# EAGLE board PCB-164D316B_brd (EAGLE 9.6.2), part 1 of 2
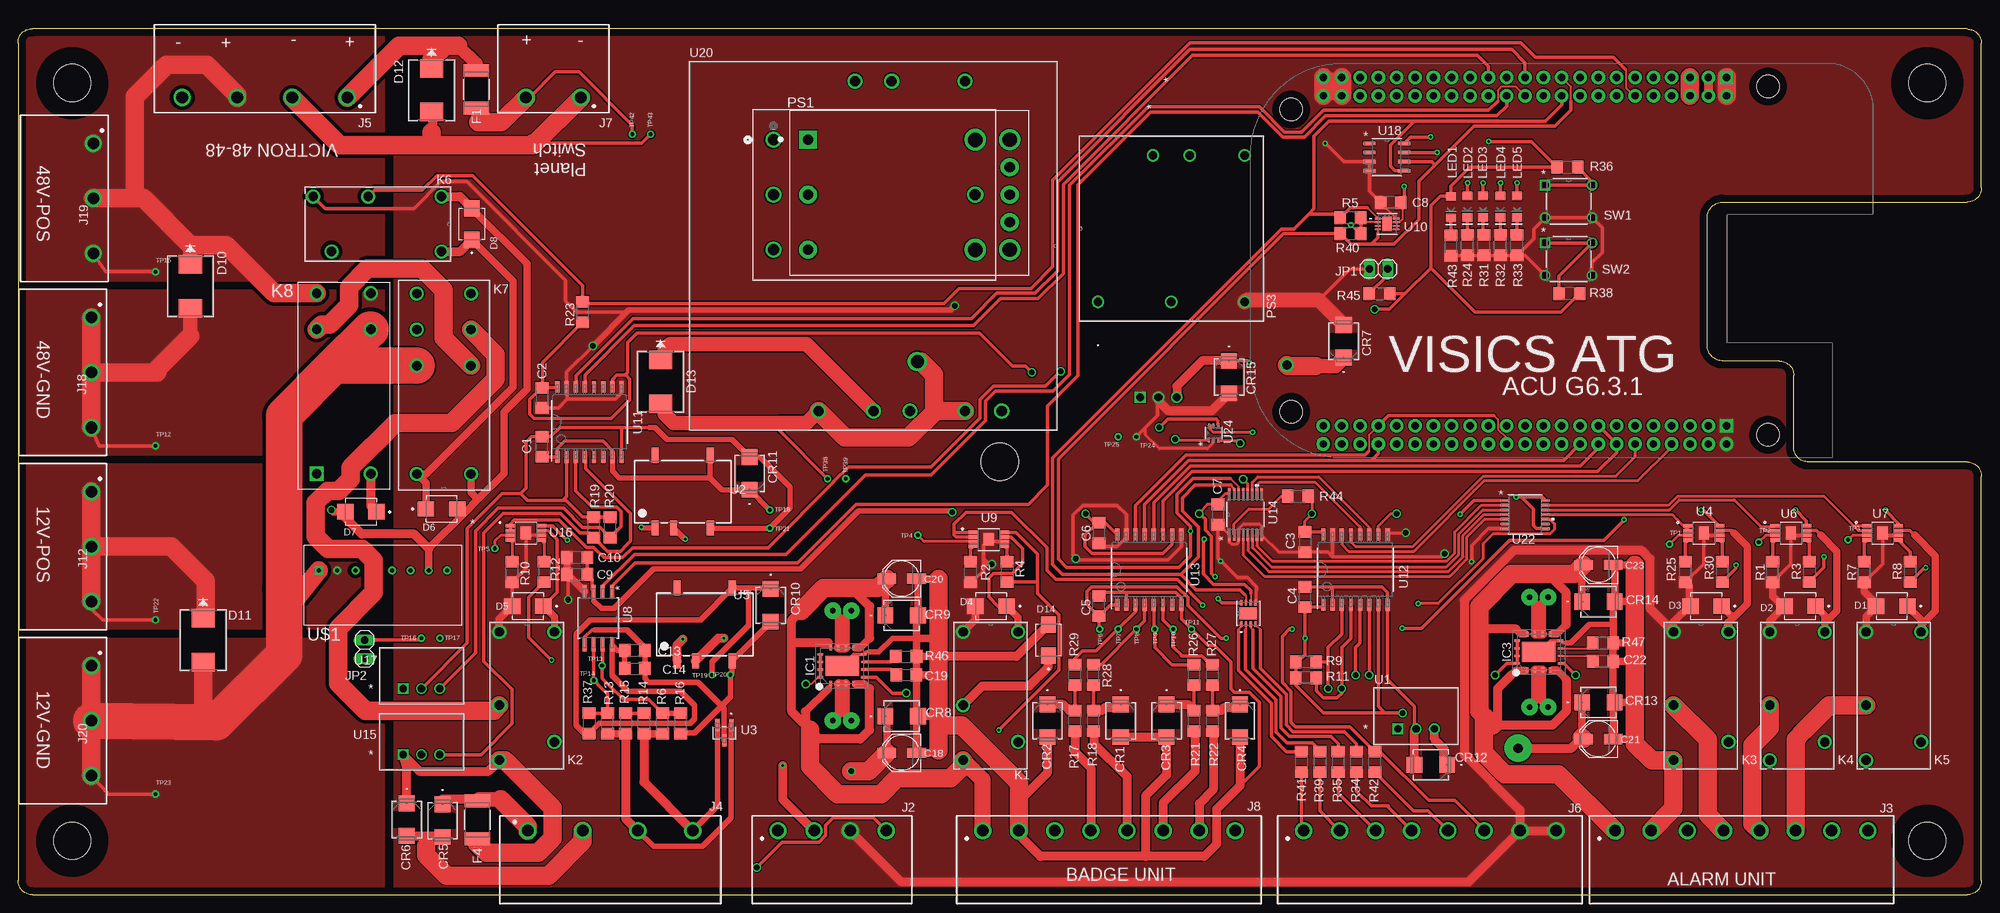
[diagram p0: board, top side]
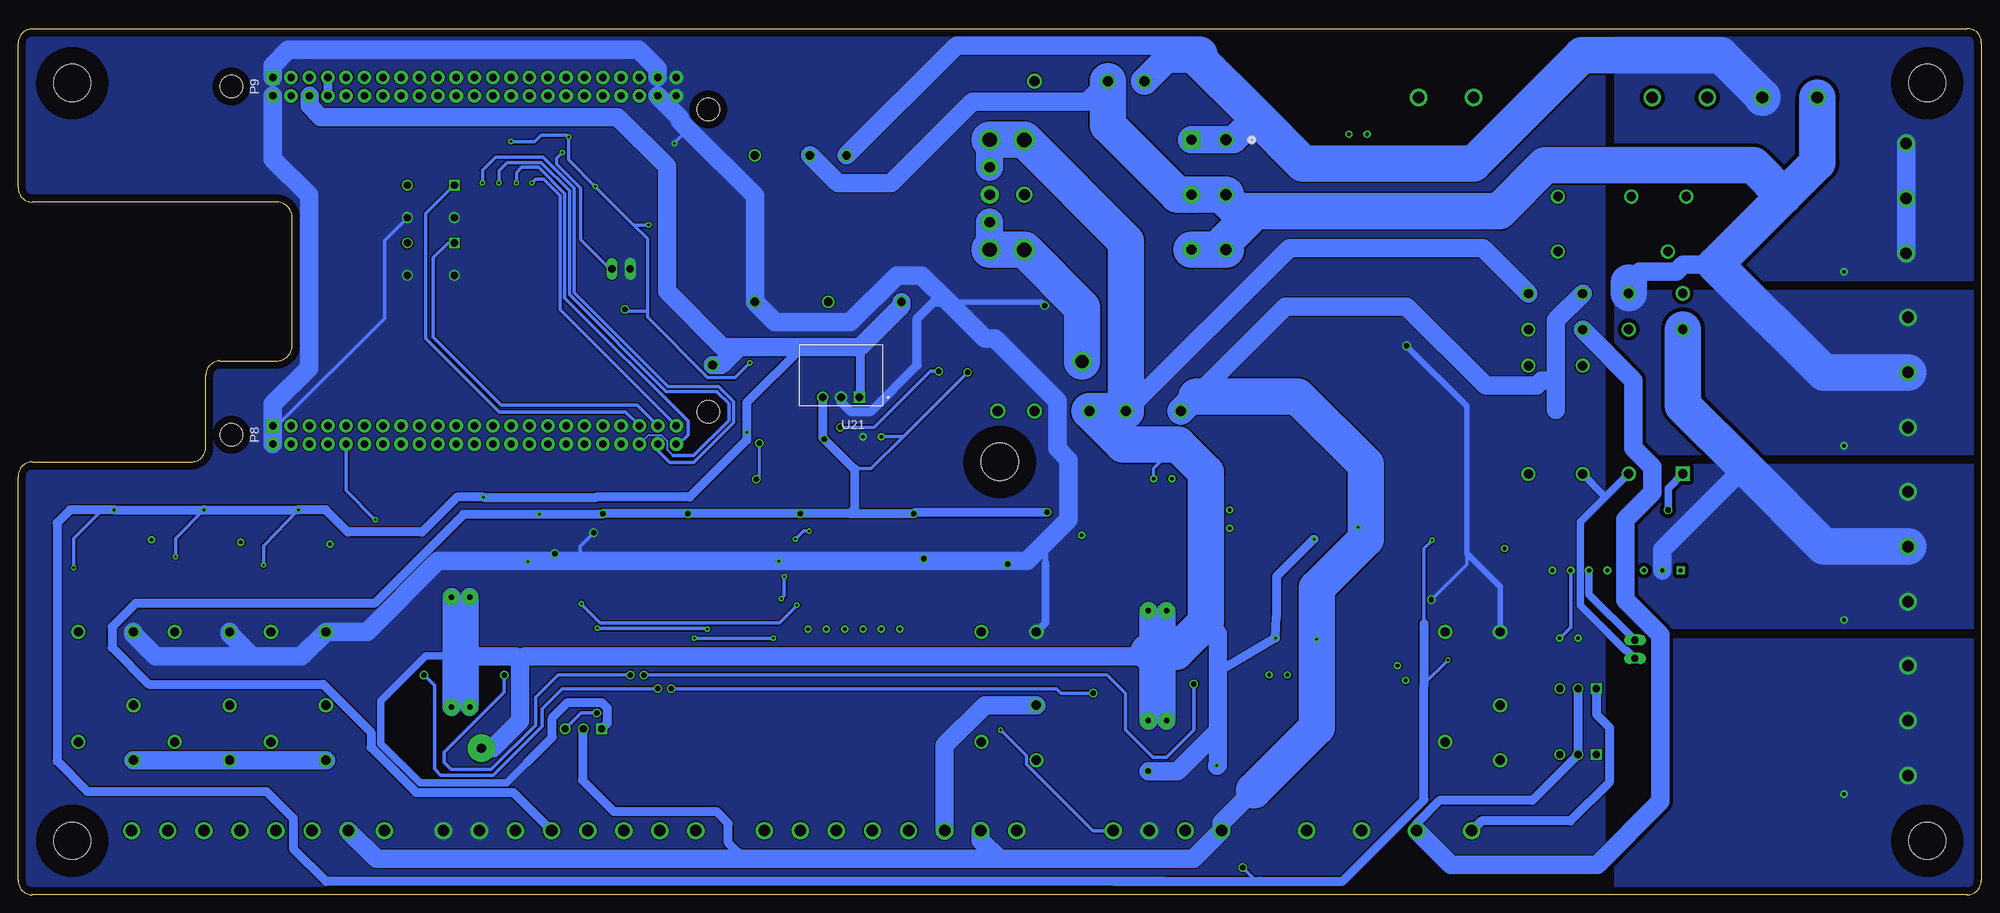
[diagram p1: board, bottom side, seen from below]

Size 272.01 x 120.01 mm. Coordinates in mm from the lower left corner, seen from the top.
Outline: 2.01,0 270.01,0 arc90 272.01,2 272.01,58 arc90 270.01,60 248.01,60 arc-90 246.01,62 246.01,72 arc90 244.01,74 236.01,74 arc-80 234.01,76 234.01,94 arc-80 236.01,96 270.01,96 arc90 272.01,98 272.01,118 arc90 270.01,120 2.01,120 arc100 0.01,118 0.01,2 arc90 2.01,0
Copper layers (1*16): Top 0.035mm / dielectric 1.5mm / Bottom 0.035mm
Design rules "default *": minimum track width 6mil, minimum drill 0.35mm, track to track 6mil, track to pad 6mil, pad to pad 6mil, via to via 6mil, smd to smd 6mil, copper to edge 40mil, drill to drill 6mil, minimum pad ring 10mil, minimum via ring 8mil, stop-mask expansion 4mil, vias tented up to drill 0mil, thermal gap 10mil
Net classes: 1 Power: clearance 0.508 mm to class 0, clearance 0.508 mm
Holes 5.2 mm at 7.51,7.5 7.51,112.5 264.51,112.5 264.51,7.5 136.01,60
tRestrict: area 2.5,2.5 to 12.5,12.5; area 131,55 to 141,65; area 259.5,107.5 to 269.5,117.5; area 259.5,2.5 to 269.5,12.5; area 2.5,107.5 to 12.5,117.5
bRestrict: area 2.5,2.5 to 12.5,12.5; area 2.5,107.5 to 12.5,117.5; area 131,55 to 141,65; area 259.5,107.5 to 269.5,117.5; area 259.5,2.5 to 269.5,12.5

## Footprints (pad centres in the part's own frame; a part is rotated, then mirrored left to right if it is on the bottom)
BEAGLE_BONE_BLACK_CAPE = drill 1.016 pad 1.88 square: P8.1 -24.13,20.955; P9.1 -24.13,-27.305 | drill 1.016 pad 1.88: P8.2 -24.13,23.495; P8.3 -21.59,20.955; P8.4 -21.59,23.495; P8.5 -19.05,20.955; P8.6 -19.05,23.495; P8.7 -16.51,20.955; P8.8 -16.51,23.495; P8.9 -13.97,20.955; P8.10 -13.97,23.495; P8.11 -11.43,20.955; P8.12 -11.43,23.495; P8.13 -8.89,20.955; P8.14 -8.89,23.495; P8.15 -6.35,20.955; P8.16 -6.35,23.495; P8.17 -3.81,20.955; P8.18 -3.81,23.495; P8.19 -1.27,20.955; P8.20 -1.27,23.495; P8.21 1.27,20.955; P8.22 1.27,23.495; P8.23 3.81,20.955; P8.24 3.81,23.495; P8.25 6.35,20.955; P8.26 6.35,23.495; P8.27 8.89,20.955; P8.28 8.89,23.495; P8.29 11.43,20.955; P8.30 11.43,23.495; P8.31 13.97,20.955; P8.32 13.97,23.495; P8.33 16.51,20.955; P8.34 16.51,23.495; P8.35 19.05,20.955; P8.36 19.05,23.495; P8.37 21.59,20.955; P8.38 21.59,23.495; P8.39 24.13,20.955; P8.40 24.13,23.495; P8.41 26.67,20.955; P8.42 26.67,23.495; P8.43 29.21,20.955; P8.44 29.21,23.495; P8.45 31.75,20.955; P8.46 31.75,23.495; P9.2 -24.13,-24.765; P9.3 -21.59,-27.305; P9.4 -21.59,-24.765; P9.5 -19.05,-27.305; P9.6 -19.05,-24.765; P9.7 -16.51,-27.305; P9.8 -16.51,-24.765; P9.9 -13.97,-27.305; P9.10 -13.97,-24.765; P9.11 -11.43,-27.305; P9.12 -11.43,-24.765; P9.13 -8.89,-27.305; P9.14 -8.89,-24.765; P9.15 -6.35,-27.305; P9.16 -6.35,-24.765; P9.17 -3.81,-27.305; P9.18 -3.81,-24.765; P9.19 -1.27,-27.305; P9.20 -1.27,-24.765; P9.21 1.27,-27.305; P9.22 1.27,-24.765; P9.23 3.81,-27.305; P9.24 3.81,-24.765; P9.25 6.35,-27.305; P9.26 6.35,-24.765; P9.27 8.89,-27.305; P9.28 8.89,-24.765; P9.29 11.43,-27.305; P9.30 11.43,-24.765; P9.31 13.97,-27.305; P9.32 13.97,-24.765; P9.33 16.51,-27.305; P9.34 16.51,-24.765; P9.35 19.05,-27.305; P9.36 19.05,-24.765; P9.37 21.59,-27.305; P9.38 21.59,-24.765; P9.39 24.13,-27.305; P9.40 24.13,-24.765; P9.41 26.67,-27.305; P9.42 26.67,-24.765; P9.43 29.21,-27.305; P9.44 29.21,-24.765; P9.45 31.75,-27.305; P9.46 31.75,-24.765 | hole 3.175: -29.845,-26.035; 36.195,-22.86; 36.195,19.05; -29.845,22.225
C1206 = smd 1.6 x 1.8: 1 -1.4,0; 2 1.4,0
PANASONIC_C = smd 2.6 x 1.4: + 2.05,0; - -2.05,0
DO-214AA(SMB_J-BEND)_LTF-M = smd 2.184 x 2.235: 1 -2.261,0; 2 2.261,0
DIOM4336X265N = smd 2.28 x 2.12: A 2.165,0; C -2.165,0
SMDJSERIES_LTF-M = smd 2.565 x 3.2: 1 -3.035,0; 2 3.035,0
0ZCG_BEL = smd 1.778 x 3.505: 1 -2.616,0; 2 2.616,0
QFN105P500X600X80-17N = smd 0.75 x 0.3: 1 -2.5,1.575; 2 -2.5,0.525; 3 -2.5,-0.525; 4 -2.5,-1.575; 9 2.5,-1.575; 10 2.5,-0.525; 11 2.5,0.525; 12 2.5,1.575 | smd 0.3 x 0.75: 5 -1.575,-3; 6 -0.525,-3; 7 0.525,-3; 8 1.575,-3; 13 1.575,3; 14 0.525,3; 15 -0.525,3; 16 -1.575,3 | smd 2.75 x 4.65: 17 0,0
691313710004 = drill 1.6: 1 -7.5,0; 2 -2.5,0; 3 2.5,0; 4 7.5,0
691313710008 = drill 1.6: 1 -17.5,0; 2 -12.5,0; 3 -7.5,0; 4 -2.5,0; 5 2.5,0; 6 7.5,0; 7 12.5,0; 8 17.5,0
691313410004 = drill 1.6: 1 -11.43,0; 2 -3.81,0; 3 3.81,0; 4 11.43,0
691313410002 = drill 1.6: 1 -3.81,0; 2 3.81,0
691313410003 = drill 1.6: 1 -7.62,0; 2 0,0; 3 7.62,0
1X02 = drill 1.016 long: 1 -1.27,0; 2 1.27,0
RELAY_G5Q-1_DC5_OMR = drill 1.3 pad 1.808: 1 -7.62,17.64; 2 -7.62,7.48; 3 -7.62,-0.14; 4 0,2.4; 5 0,17.64
RELAY_G2RL-2_OMR = drill 1.295 pad 1.803: 1 -7.5,24.6; 2 -7.5,9.6; 3 -7.5,4.6; 4 -7.5,-0.4; 5 0,-0.4; 6 0,4.6; 7 0,9.6; 8 0,24.6
G2RG-2A4 = drill 1.3 square: COIL1 2.1,10.2 | drill 1.3: COIL2 2.1,2.7; COM1 22.1,10.2; COM2 22.1,2.7; NO1 27.1,10.2; NO2 27.1,2.7
LED-1206 = smd 1.2 x 1.4: A -1.5,0; C 1.5,0
CONV_ULS-12/5-D48N-C = drill 1.4 pad 2.54 square: 1 -14,7.37 | drill 1.4 pad 2.54: 2 -14,-0.25; 3 -14,-7.87; 5 13.94,-4.06; 6 13.94,-0.25; 7 13.94,3.56 | drill 1.956 pad 2.54: 4 13.94,-7.87; 8 13.94,7.37
REC20K_RCP = drill 1.143 pad 1.651: 1 0,0; 2 0,-5.08; 3 0,-12.7; 4 -20.32,-12.7; 5 -20.32,-2.54; 6 -20.32,7.62
R1206 = smd 1.6 x 1.803: 1 -1.422,0; 2 1.422,0
SW4_1825910-B_TEC = drill 0.991 pad 1.499 square: 1 -6.5,4.5 | drill 0.991 pad 1.499: 2 0,4.5; 3 -6.5,0; 4 0,0
SMALL-TH = drill 0.508 pad 1.016: P$1 0,0
SIP3_R-78K-0.5_RCP = drill 0.991 pad 1.499 square: 1 0,0 | drill 0.991 pad 1.499: 2 2.54,0; 3 5.08,0
WPME-FISM_SMT-8_L13.2W11.4H7.25 = smd 1 x 2.1: 1 -3.81,-5.05; 2 -1.27,-5.05; 4 3.81,-5.05; 5 3.81,5.05; 8 -3.81,5.05
SOT23_SEM-M = smd 0.61 x 1.626: 1 -0.95,-1.067; 2 0.95,-1.067; 3 0,1.067
SOP65P490X110-9N = smd 1.47 x 0.48: 1 -2.15,0.975; 2 -2.15,0.325; 3 -2.15,-0.325; 4 -2.15,-0.975; 5 2.15,-0.975; 6 2.15,-0.325; 7 2.15,0.325; 8 2.15,0.975 | smd 1.425 x 1.76: 9 0,0
21-0262_W8MS+1_ADI-M = smd 1.778 x 0.559: 1 -3.708,1.905; 2 -3.708,0.635; 3 -3.708,-0.635; 4 -3.708,-1.905; 5 3.708,-1.905; 6 3.708,-0.635; 7 3.708,0.635; 8 3.708,1.905
WSON8_DEJ_TEX-M = smd 0.864 x 0.254: 1 -1.27,0.75; 2 -1.27,0.25; 3 -1.27,-0.25; 4 -1.27,-0.75; 5 1.27,-0.75; 6 1.27,-0.25; 7 1.27,0.25; 8 1.27,0.75 | smd 1.295 x 2.007: 9 0,0
DW0016B_HV = smd 1.65 x 0.6: 1 -4.875,4.445; 2 -4.875,3.175; 3 -4.875,1.905; 4 -4.875,0.635; 5 -4.875,-0.635; 6 -4.875,-1.905; 7 -4.875,-3.175; 8 -4.875,-4.445; 9 4.875,-4.445; 10 4.875,-3.175; 11 4.875,-1.905; 12 4.875,-0.635; 13 4.875,0.635; 14 4.875,1.905; 15 4.875,3.175; 16 4.875,4.445
21-0055H_16_MXM-M = smd 1.664 x 0.356: 1 -2.826,2.223; 2 -2.826,1.587; 3 -2.826,0.953; 4 -2.826,0.318; 5 -2.826,-0.318; 6 -2.826,-0.953; 7 -2.826,-1.587; 8 -2.826,-2.223; 9 2.826,-2.223; 10 2.826,-1.587; 11 2.826,-0.953; 12 2.826,-0.318; 13 2.826,0.318; 14 2.826,0.953; 15 2.826,1.587; 16 2.826,2.223
SOIC8_4P9X3P9MC_MCH-L = smd 1.676 x 0.508: 1 -2.413,1.905; 2 -2.413,0.635; 3 -2.413,-0.635; 4 -2.413,-1.905; 5 2.413,-1.905; 6 2.413,-0.635; 7 2.413,0.635; 8 2.413,1.905
PKU4913DPIHS_FPM = drill 1.499 pad 2.007: 1 0,0; 2 0,-7.62; 3 0,-15.24; 6 27.94,-7.62 | drill 2.007 pad 2.515: 4 27.94,-15.24; 8 27.94,0
SKA60_MWU = drill 1.397 pad 1.905: 1 0,0; 2 0,-10.16; 3 0,-15.24; 4 45.72,-20.32; 5 45.72,-12.7; 6 45.72,-7.62; 7 45.72,0; 8 45.72,5.08
CONV_R-78K3.3-2.0 = drill 1.07 square: 1 -2.54,3.05 | drill 1.07: 2 0,3.05; 3 2.54,3.05
TSSOP_0104PWR_TEX-L = smd 1.168 x 0.305: 1 -2.87,1.95; 2 -2.87,1.3; 3 -2.87,0.65; 4 -2.87,0; 5 -2.87,-0.65; 6 -2.87,-1.3; 7 -2.87,-1.95; 8 2.87,-1.95; 9 2.87,-1.3; 10 2.87,-0.65; 11 2.87,0; 12 2.87,0.65; 13 2.87,1.3; 14 2.87,1.95
HVSON8_3X3_NXP = smd 0.762 x 0.305: 1 -1.473,0.991; 2 -1.473,0.33; 3 -1.473,-0.33; 4 -1.473,-0.991; 5 1.473,-0.991; 6 1.473,-0.33; 7 1.473,0.33; 8 1.473,0.991 | smd 1.651 x 2.438: 9 0,0
SC70-6_DCK_TEX-L = smd 0.648 x 0.305: 1 -1.022,0.65; 2 -1.022,0; 3 -1.022,-0.65; 4 1.022,-0.65; 5 1.022,0; 6 1.022,0.65
SPBW03G-12 = drill 0.6: +VIN 4.572,7.62; +VOUT 14.732,7.62; -VOUT 17.272,7.62; NC1 12.192,7.62; NC2 19.812,7.62; RC 7.112,7.62 | drill 0.6 square: -VIN 2.032,7.62

## Placement (x,y rotation side)
B1  SPARKFUN_BEAGLE_BONE_BLACK_CAPE  [BEAGLE_BONE_BLACK_CAPE]  212.59,85.98 180 top
C1  0.1uF  [C1206]  72.57,62.1 90 top
C2  0.1uF  [C1206]  72.57,68.9 270 top
C3  0.1uF  [C1206]  178.3,48.9 270 top
C4  0.1uF  [C1206]  178.3,41.27 90 top
C5  0.1uF  [C1206]  149.72,40.01 90 top
C6  0.1uF  [C1206]  149.72,50.16 270 top
C7  47nF  [C1206]  166.23,52.7 270 top
C8  0.1uF  [C1206]  190.17,95.95 180 top
C9  1uF  [C1206]  77.46,44.39 180 top
C10  0.1uF  [C1206]  77.46,46.74 180 top
C13  1uF  [C1206]  85.46,33.91 0 top
C14  0.1uF  [C1206]  85.46,31.37 0 top
C18  56uF  [PANASONIC_C]  122.42,19.68 180 top
C19  180pF  [C1206]  123.05,30.48 0 top
C20  56uF  [PANASONIC_C]  122.42,43.81 180 top
C21  56uF  [PANASONIC_C]  218.94,21.59 180 top
C22  180pF  [C1206]  219.57,32.38 0 top
C23  56uF  [PANASONIC_C]  218.94,45.72 180 top
CR1  SMBJ6.0A  [DO-214AA(SMB_J-BEND)_LTF-M]  152.77,24.13 270 top
CR2  SMBJ6.0A  [DO-214AA(SMB_J-BEND)_LTF-M]  142.61,24.13 270 top
CR3  SMBJ6.0A  [DO-214AA(SMB_J-BEND)_LTF-M]  159.12,24.13 270 top
CR4  SMBJ6.0A  [DO-214AA(SMB_J-BEND)_LTF-M]  169.28,24.13 270 top
CR5  SMBJ18A  [DO-214AA(SMB_J-BEND)_LTF-M]  58.81,10.29 270 top
CR6  SMBJ18A  [DO-214AA(SMB_J-BEND)_LTF-M]  53.85,10.43 270 top
CR7  SMBJ6.0A  [DO-214AA(SMB_J-BEND)_LTF-M]  183.65,76.71 90 top
CR8  SMBJ15A  [DO-214AA(SMB_J-BEND)_LTF-M]  122.42,24.77 0 top
CR9  SMBJ15A  [DO-214AA(SMB_J-BEND)_LTF-M]  122.42,38.73 0 top
CR10  SMBJ6.0A  [DO-214AA(SMB_J-BEND)_LTF-M]  104.27,40.13 270 top
CR11  SMBJ6.0A  [DO-214AA(SMB_J-BEND)_LTF-M]  101.35,58.42 90 top
CR12  SMBJ6.0A  [DO-214AA(SMB_J-BEND)_LTF-M]  195.71,18.03 180 top
CR13  SMBJ15A  [DO-214AA(SMB_J-BEND)_LTF-M]  218.94,26.67 0 top
CR14  SMBJ15A  [DO-214AA(SMB_J-BEND)_LTF-M]  218.94,40.64 0 top
CR15  SMBJ6.0A  [DO-214AA(SMB_J-BEND)_LTF-M]  167.77,71.75 270 top
D1  ES2D  [DIOM4336X265N]  259.58,40.01 180 top
D2  ES2D  [DIOM4336X265N]  246.88,40.01 180 top
D3  ES2D  [DIOM4336X265N]  233.86,40.01 180 top
D4  ES2D  [DIOM4336X265N]  134.8,40.01 180 top
D5  ES2D  [DIOM4336X265N]  70.62,40.01 180 top
D6  ES2D  [DIOM4336X265N]  58.68,53.47 0 top
D7  ES2D  [DIOM4336X265N]  47.5,53.09 180 top
D8  ES2D  [DIOM4336X265N]  62.87,92.96 90 top
D10  SMDJ64A  [SMDJSERIES_LTF-M]  23.88,84.33 270 top
D11  SMDJ64A  [SMDJSERIES_LTF-M]  25.66,35.31 270 top
D12  SMDJ64A  [SMDJSERIES_LTF-M]  57.28,111.51 270 top
D13  SMDJ15A  [SMDJSERIES_LTF-M]  89.03,71.12 270 top
D14  ES2D  [DIOM4336X265N]  142.75,35.31 90 top
F1  0ZCG0160BF2C  [0ZCG_BEL]  63.51,111.63 90 top
F4  0ZCG0160BF2C  [0ZCG_BEL]  63.63,10.4 270 top
IC1  NIV3071MTW3TWG  [QFN105P500X600X80-17N]  114.16,31.75 90 top
IC3  NIV3071MTW3TWG  [QFN105P500X600X80-17N]  210.68,33.66 90 top
J2  691313710004  [691313710004]  112.78,8.89 0 top
J3  691313710008  [691313710008]  238.77,8.89 0 top
J4  691313410004  [691313410004]  82.05,8.89 0 top
J5  691313410004  [691313410004]  34.17,110.49 180 top
J6  691313710008  [691313710008]  195.59,8.89 0 top
J7  691313410002  [691313410002]  74.17,110.49 180 top
J8  691313710008  [691313710008]  151.14,8.89 0 top
J12  691313410003  [691313410003]  10.17,48.26 270 top
J18  691313410003  [691313410003]  10.17,72.39 270 top
J19  691313410003  [691313410003]  10.42,96.52 270 top
J20  691313410003  [691313410003]  10.17,24.13 270 top
JP1  PINHD1X2  [1X02]  188.47,86.74 180 top
JP2  PINHD1X2  [1X02]  48.01,34.04 270 top
K1  G5Q-14_DC5  [RELAY_G5Q-1_DC5_OMR]  138.55,18.8 0 top
K2  G5Q-14_DC5  [RELAY_G5Q-1_DC5_OMR]  74.3,18.8 0 top
K3  G5Q-14_DC5  [RELAY_G5Q-1_DC5_OMR]  236.97,18.8 0 top
K4  G5Q-14_DC5  [RELAY_G5Q-1_DC5_OMR]  250.31,18.8 0 top
K5  G5Q-14_DC5  [RELAY_G5Q-1_DC5_OMR]  263.64,18.8 0 top
K6  G5Q-14_DC5  [RELAY_G5Q-1_DC5_OMR]  41.03,89.15 270 top
K7  G2RL-2_DC5  [RELAY_G2RL-2_OMR]  55.25,82.93 180 top
K8  G2RG-2A4 DC5  [G2RG-2A4]  51.57,56.26 90 top
LED1  150120GS75000  [LED-1206]  198.49,95.31 270 top
LED2  150120AS75000  [LED-1206]  200.79,95.38 270 top
LED3  150120RS75000  [LED-1206]  202.95,95.38 270 top
LED4  150120YS75000  [LED-1206]  205.37,95.38 270 top
LED5  150120BS75000  [LED-1206]  207.65,95.38 270 top
PS1  ULS-12/5-D48N-C  [CONV_ULS-12/5-D48N-C]  123.45,97.28 0 top
PS3  REC30K-4805SZ  [REC20K_RCP]  157.23,102.49 90 top
R1  1K  [R1206]  243.07,44.77 270 top
R2  1K  [R1206]  131.94,44.77 270 top
R3  100K  [R1206]  248.15,44.77 90 top
R4  100K  [R1206]  137.02,44.77 90 top
R5  4.7K  [R1206]  184.58,93.85 180 top
R6  10R  [R1206]  89.27,23.75 270 top
R7  1K  [R1206]  255.77,44.77 270 top
R8  100K  [R1206]  262.12,44.77 90 top
R9  15K  [R1206]  178.44,32.26 0 top
R10  1K  [R1206]  68.46,44.77 270 top
R11  15K  [R1206]  178.44,30.1 0 top
R12  100K  [R1206]  72.9,44.77 90 top
R13  10R  [R1206]  81.65,23.75 270 top
R14  330R  [R1206]  86.73,23.75 270 top
R15  120R  [R1206]  84.19,23.75 90 top
R16  5.1K  [R1206]  91.81,23.75 270 top
R17  100R  [R1206]  146.42,24.13 270 top
R18  100R  [R1206]  148.96,24.13 270 top
R19  20K  [R1206]  79.76,50.93 270 top
R20  20K  [R1206]  82.05,50.93 270 top
R21  100R  [R1206]  162.93,24.13 270 top
R22  100R  [R1206]  165.47,24.13 270 top
R23  20K  [R1206]  78.24,80.77 270 top
R24  510R  [R1206]  200.79,90.04 270 top
R25  1K  [R1206]  231,44.77 270 top
R26  100R  [R1206]  162.93,30.48 270 top
R27  100R  [R1206]  165.47,30.48 270 top
R28  100R  [R1206]  148.96,30.48 270 top
R29  100R  [R1206]  146.42,30.48 270 top
R30  100K  [R1206]  236.08,44.77 90 top
R31  510R  [R1206]  203.08,90.04 270 top
R32  510R  [R1206]  205.37,90.04 270 top
R33  510R  [R1206]  207.65,90.04 270 top
R34  25R  [R1206]  185.43,18.41 90 top
R35  25R  [R1206]  182.89,18.41 90 top
R36  10K  [R1206]  214.64,100.84 180 top
R37  5.1K  [R1206]  79.11,23.75 90 top
R38  10K  [R1206]  214.89,83.31 0 top
R39  75R  [R1206]  180.35,18.41 90 top
R40  4.7K  [R1206]  184.58,91.63 180 top
R41  DNP  [R1206]  177.81,18.41 90 top
R42  10K  [R1206]  187.97,18.41 270 top
R43  510R  [R1206]  198.53,89.98 270 top
R44  10K  [R1206]  177.3,55.24 180 top
R45  10K  [R1206]  188.6,83.31 180 top
R46  62K  [R1206]  123.05,33.02 180 top
R47  62K  [R1206]  219.57,34.92 180 top
SW1  1825910-6  [SW4_1825910-B_TEC]  218.07,93.85 0 top
SW2  1825910-6  [SW4_1825910-B_TEC]  218.07,85.85 0 top
TP1  TH  [SMALL-TH]  228.78,48.58 0 top
TP2  TH  [SMALL-TH]  241.16,48.9 0 top
TP3  TH  [SMALL-TH]  253.54,49.21 0 top
TP4  TH  [SMALL-TH]  124.64,49.85 0 top
TP5  TH  [SMALL-TH]  66.05,48.01 0 top
TP6  TH  [SMALL-TH]  149.87,36.83 90 top
TP7  TH  [SMALL-TH]  152.41,36.83 90 top
TP8  TH  [SMALL-TH]  154.95,36.83 90 top
TP9  TH  [SMALL-TH]  157.49,36.83 90 top
TP10  TH  [SMALL-TH]  160.03,36.83 90 top
TP11  TH  [SMALL-TH]  162.57,36.83 0 top
TP12  TH  [SMALL-TH]  19.06,62.23 0 top
TP13  TH  [SMALL-TH]  80.91,31.75 0 top
TP14  TH  [SMALL-TH]  79.76,29.72 0 top
TP15  TH  [SMALL-TH]  19.06,86.36 0 top
TP16  TH  [SMALL-TH]  55.89,35.56 90 top
TP17  TH  [SMALL-TH]  58.43,35.56 90 top
TP18  TH  [SMALL-TH]  104.15,53.34 90 top
TP19  TH  [SMALL-TH]  96.15,30.48 0 top
TP20  TH  [SMALL-TH]  98.69,30.48 0 top
TP21  TH  [SMALL-TH]  104.15,50.8 90 top
TP22  TH  [SMALL-TH]  19.06,38.1 0 top
TP23  TH  [SMALL-TH]  19.06,13.97 0 top
TP24  TH  [SMALL-TH]  154.95,63.5 270 top
TP25  TH  [SMALL-TH]  152.41,63.5 270 top
TP38  TH  [SMALL-TH]  112.15,57.66 0 top
TP39  TH  [SMALL-TH]  114.69,57.66 0 top
TP42  TH  [SMALL-TH]  85.1,105.41 90 top
TP43  TH  [SMALL-TH]  87.64,105.41 90 top
U1  R-78K5.0-0.5  [SIP3_R-78K-0.5_RCP]  191.14,22.99 0 top
U2  1769205241  [WPME-FISM_SMT-8_L13.2W11.4H7.25]  92.08,55.88 0 top
U3  SM712.TCT  [SOT23_SEM-M]  97.84,22.48 180 top
U4  TPS1H200AQDGNRQ1  [SOP65P490X110-9N]  233.54,50.16 0 top
U5  1769205241  [WPME-FISM_SMT-8_L13.2W11.4H7.25]  95.13,37.47 0 top
U6  TPS1H200AQDGNRQ1  [SOP65P490X110-9N]  245.61,50.16 0 top
U7  TPS1H200AQDGNRQ1  [SOP65P490X110-9N]  258.31,50.16 0 top
U8  MAX22026FAWA+  [21-0262_W8MS+1_ADI-M]  80.38,38.35 270 top
U9  TPS1H200AQDGNRQ1  [SOP65P490X110-9N]  134.48,49.28 0 top
U10  HDC3022QDEJRQ1  [WSON8_DEJ_TEX-M]  189.66,92.96 0 top
U11  ISO7742DWR  [DW0016B_HV]  79.17,65.53 90 top
U12  ISO7742DWR  [DW0016B_HV]  185.28,45.09 90 top
U13  ISO7740DWR  [DW0016B_HV]  156.71,45.09 90 top
U14  MAX7320AEE+  [21-0055H_16_MXM-M]  170.04,52.7 90 top
U15  R-78K5.0-0.5  [SIP3_R-78K-0.5_RCP]  53.35,19.43 0 top
U16  TPS1H200AQDGNRQ1  [SOP65P490X110-9N]  70.36,50.16 0 top
U17  R-78K5.0-0.5  [SIP3_R-78K-0.5_RCP]  53.35,28.57 0 top
U18  AT24CM02-SSHD-B  [SOIC8_4P9X3P9MC_MCH-L]  189.62,102.23 0 top
U19  PKU4913DPIHS  [PKU4913DPIHS_FPM]  104.65,104.65 0 top
U20  SKA60C-12  [SKA60_MWU]  131.2,112.78 270 top
U21  R-78K3.3-2.0  [CONV_R-78K3.3-2.0]  157.99,72.01 180 bottom
U22  TXU0104PWR  [TSSOP_0104PWR_TEX-L]  208.79,52.7 0 top
U23  PCA9632TK,118  [HVSON8_3X3_NXP]  170.44,38.99 90 top
U24  TXU0101DCKRSC70-6_DCK_TEX-L  [SC70-6_DCK_TEX-L]  165.61,64.01 90 top
U$1  SPAN02C-05  [SPBW03G-12]  39.63,37.34 0 top

## Library data of the parts
B1 = SparkFun-Boards
C1-C10 C13 C14 C18-C23 R1-R47 = adafruit
CR1-CR15 = SMBJ5_0A; COPYRIGHT: Copyright (C) 2024 Ultra Librarian. All rights reserved.; MANUFACTURER_PART_NUMBER: SMBJ5.0A; MFR_NAME: Littelfuse Inc
D1-D8 D14 = ES2D; CHECK_PRICES: https://www.snapeda.com/parts/ES2D/taiwan/view-part/?ref=eda; DESCRIPTION: 35ns, 2A, 200V, Super Fast Recovery Rectifier; DIGIKEY_PART_NUMBER: 1801-ES2DTR-ND; MF: Taiwan Semiconductor; MP: ES2D; PACKAGE: SMD-2 Taiwan Semiconductor; SNAPEDA_LINK: https://www.snapeda.com/parts/ES2D/taiwan/view-part/?ref=snap
D10-D13 = SMDJ64A; COPYRIGHT: Copyright (C) 2025 Ultra Librarian. All rights reserved.; MANUFACTURER_PART_NUMBER: SMDJ64A; MFR_NAME: Littelfuse Inc
F1 F4 = resettable fuse 3.2A; COPYRIGHT: Copyright (C) 2024 Ultra Librarian. All rights reserved.; MANUFACTURER_PART_NUMBER: 0ZCG0160BF2C; MFR_NAME: Belfuse
IC1 IC3 = NIV3071MTW3TWG; DESCRIPTION: Electronic fuse (eFuse) 4-channel, 8V to 60V, 10A in 5x6mm package; HEIGHT: 0.8mm; MANUFACTURER_NAME: onsemi; MANUFACTURER_PART_NUMBER: NIV3071MTW3TWG; MOUSER_PART_NUMBER: 863-NIV3071MTW3TWG; MOUSER_PRICE-STOCK: https://www.mouser.co.uk/ProductDetail/onsemi/NIV3071MTW3TWG?qs=Z%252BL2brAPG1LjnaaESAxKkw%3D%3D
J2 = Wago_connectors; DATASHEET-URL: https://www.we-online.com/redexpert/spec/691313710004?ae; IR-UL: 20A; IR-VDE: 20A; MOUNT: THT; PART-NUMBER: 691313710004; PINS: 4; PITCH: 5mm; TYPE: Horizontal; WORKING-VOLTAGE-UL: 300V (AC); WORKING-VOLTAGE-VDE: 300V (AC)
J3 J6 J8 = Wago_connectors; DATASHEET-URL: https://www.we-online.com/redexpert/spec/691313710008?ae; IR-UL: 20A; IR-VDE: 20A; MOUNT: THT; PART-NUMBER: 691313710008; PINS: 8; PITCH: 5mm; TYPE: Horizontal; WORKING-VOLTAGE-UL: 300V (AC); WORKING-VOLTAGE-VDE: 300V (AC)
J4 J5 = Wago_connectors; DATASHEET-URL: https://www.we-online.com/redexpert/spec/691313410004?ae; IR-UL: 20A; MOUNT: THT; PART-NUMBER: 691313410004; PINS: 4; PITCH: 7.62mm; TYPE: Horizontal; WORKING-VOLTAGE-UL: 300V (AC)
J7 = Wago_connectors; DATASHEET-URL: https://www.we-online.com/redexpert/spec/691313410002?ae; IR-UL: 20A; MOUNT: THT; PART-NUMBER: 691313410002; PINS: 2; PITCH: 7.62mm; TYPE: Horizontal; WORKING-VOLTAGE-UL: 300V (AC)
J12 J18-J20 = Wago_connectors; DATASHEET-URL: https://www.we-online.com/redexpert/spec/691313410003?ae; IR-UL: 20A; MOUNT: THT; PART-NUMBER: 691313410003; PINS: 3; PITCH: 7.62mm; TYPE: Horizontal; WORKING-VOLTAGE-UL: 300V (AC)
JP1 JP2 = pinhead
K1-K6 = G5Q_14_DC5; COPYRIGHT: Copyright (C) 2024 Ultra Librarian. All rights reserved.; MANUFACTURER_PART_NUMBER: G5Q-14 DC5; MFR_NAME: Omron
K7 = G2RL_2_DC5; COPYRIGHT: Copyright (C) 2025 Ultra Librarian. All rights reserved.; MANUFACTURER_PART_NUMBER: G2RL-2 DC5; MFR_NAME: Omron
K8 = Omron G2RG-2A4
LED1-LED5 = SparkFun-LED
PS1 = ULS-12_5-D48N-C; MANUFACTURER: MURATA POWER SOLUTIONS; STANDARD: Manufacturer Recommendations
PS3 = REC20K_2405SZ; COPYRIGHT: Copyright (C) 2025 Ultra Librarian. All rights reserved.; MANUFACTURER_PART_NUMBER: REC20K-2405SZ; MFR_NAME: Recom Power
SW1 SW2 = 1825910_6; COPYRIGHT: Copyright (C) 2025 Ultra Librarian. All rights reserved.; MANUFACTURER_PART_NUMBER: 1825910-6; MFR_NAME: TE Connectivity
TP1-TP25 TP38 TP39 TP42 TP43 = testpad
U1 U15 U17 = R_78K5_0_0_5; COPYRIGHT: Copyright (C) 2025 Ultra Librarian. All rights reserved.; MANUFACTURER_PART_NUMBER: R-78K5.0-0.5; MFR_NAME: Recom Power; TYPE: DC DC Converters
U2 U5 = Eagle_MAGIC-FISM_rev22c; DATASHEET-URL: https://www.we-online.com/redexpert/spec/1769205241?ae; HEIGHT: 7.25mm; LENGTH: 13.2mm; MOUNT: SMT; PART-NUMBER: 1769205241; PO: 1W; SHORT-CIRCUIT-PROTECTION: continous; SIZE: SMT-8; VISO: 3000V; VOLTAGE-INPUT: 10.8-13.2V; VOLTAGE-OUTPUT: 5V; WIDTH: 11.4mm
U3 = SM712_TCT; COPYRIGHT: Copyright (C) 2024 Ultra Librarian. All rights reserved.; MANUFACTURER_PART_NUMBER: SM712.TCT; MFR_NAME: Semtech
U4 U6 U7 U9 U16 = TPS1H200AQDGNRQ1; AVAILABILITY: In Stock; CHECK_PRICES: https://www.snapeda.com/parts/TPS1H200AQDGNRQ1/Texas+Instruments/view-part/?ref=eda; DESCRIPTION: 40-V, 200-mΩ, 1-ch automotive smart high-side switch with adjustable current limit; MF: Texas Instruments; MP: TPS1H200AQDGNRQ1; PACKAGE: HVSSOP-8 Texas Instruments; PRICE: None; PURCHASE-URL: https://www.snapeda.com/api/url_track_click_mouser/?unipart_id=3210362&manufacturer=Texas Instruments&part_name=TPS1H200AQDGNRQ1&search_term=tps1h200aqdgnrq1; SNAPEDA_LINK: https://www.snapeda.com/parts/TPS1H200AQDGNRQ1/Texas+Instruments/view-part/?ref=snap
U8 = MAX22026FAWA; COPYRIGHT: Copyright (C) 2024 Ultra Librarian. All rights reserved.; MANUFACTURER_PART_NUMBER: MAX22026FAWA+; MFR_NAME: Analog Devices / Maxim Integrated; TYPE: Interface
U10 = HDC3022QDEJRQ1; COPYRIGHT: Copyright (C) 2025 Ultra Librarian. All rights reserved.; MANUFACTURER_PART_NUMBER: HDC3022QDEJRQ1; MFR_NAME: Texas Instruments; TYPE: Humidity, Moisture Sensors
U11 U12 = ISO7742DWR; COPYRIGHT: Copyright (C) 2024 Ultra Librarian. All rights reserved.; MANUFACTURER_PART_NUMBER: ISO7742DWR; MFR_NAME: Texas Instruments; REFDES: RefDes; TYPE: TYPE
U13 = ISO7740DWR; COPYRIGHT: Copyright (C) 2024 Ultra Librarian. All rights reserved.; MANUFACTURER_PART_NUMBER: ISO7740DWR; MFR_NAME: Texas Instruments; REFDES: RefDes; TYPE: TYPE
U14 = MAX7320AEE_T; COPYRIGHT: Copyright (C) 2025 Ultra Librarian. All rights reserved.; MANUFACTURER_PART_NUMBER: MAX7320AEE+T; MFR_NAME: Analog Devices / Maxim Integrated
U18 = AT24CM02_SSHD_B; COPYRIGHT: Copyright (C) 2025 Ultra Librarian. All rights reserved.; MANUFACTURER_PART_NUMBER: AT24CM02-SSHD-B; MFR_NAME: Microchip
U19 = PKU4913DPIHS; COPYRIGHT: Copyright (C) 2025 Ultra Librarian. All rights reserved.; DIGI-KEY_PART_NUMBER_1: 2166-PKU4913DPIHS-ND; MANUFACTURER_NAME: Flex Power Modules; MANUFACTURER_PART_NUMBER: PKU4913DPIHS; TYPE: DC DC Converters
U20 = SKA60C_12; COPYRIGHT: Copyright (C) 2025 Ultra Librarian. All rights reserved.; MANUFACTURER_NAME: Mean Well; MANUFACTURER_PART_NUMBER: SKA60C-12
U21 = R-78K3.3-2.0; CHECK_PRICES: https://www.snapeda.com/parts/R-78K3.3-2.0/Recom+Power/view-part/?ref=eda; DESCRIPTION: DC-DC Converter, 1 Output, 4.5-36Vin, 3.3V/2A Output, SIP3, R-78K-2.0 Series | RECOM Power Inc. R-78K3.3-2.0; DIGIKEY_PART_NUMBER: 945-R-78K3.3-2.0-ND; MF: Recom Power; MP: R-78K3.3-2.0; PACKAGE: None; SNAPEDA_LINK: https://www.snapeda.com/parts/R-78K3.3-2.0/Recom+Power/view-part/?ref=snap
U22 = TXU0104PWR; COPYRIGHT: Copyright (C) 2025 Ultra Librarian. All rights reserved.; DATASHEET: https://www.ti.com/lit/gpn/txu0104; DESCRIPTION: Four channel unidirectional level shifter 14-TSSOP -40 to 125; MANUFACTURER_NAME: Texas Instruments; MANUFACTURER_PART_NUMBER: TXU0104PWR
U23 = PCA9632TK,118; COPYRIGHT: Copyright (C) 2025 Ultra Librarian. All rights reserved.; DIGI-KEY_PART_NUMBER_1: 568-8715-2-ND; DIGI-KEY_PART_NUMBER_2: 568-8715-1-ND; DIGI-KEY_PART_NUMBER_3: 568-8715-6-ND; MANUFACTURER_NAME: NXP; MANUFACTURER_PART_NUMBER: PCA9632TK,118
U24 = TXU0101DCKR; COPYRIGHT: Copyright (C) 2025 Ultra Librarian. All rights reserved.; DESCRIPTION: Single channel fixed-direction level shifter 6-SC70 -40 to 125; MANUFACTURER_NAME: Texas Instruments; MANUFACTURER_PART_NUMBER: TXU0101DCKR
U$1 = meanwell SPBW03

## Nets
12/48VTRIG: B1.P9.12 K6.2 R23.1
+5V: B1.P9.5 B1.P9.6 CR7.1 J2.4 PS3.6 R3.1 R4.1 R8.1 R12.1 R30.1 U4.8 U6.8 U7.8 U9.8 U16.8 U21.1 U22.8 U22.14 U24.5 U24.6
+5V/3: C13.1 C14.1 CR10.1 R37.1 TP19.P$1 U5.5 U8.8
+12V: C18.+ C21.+ CR8.1 CR13.1 D13.1 IC1.2 IC1.3 IC1.10 IC1.11 IC3.2 IC3.3 IC3.10 IC3.11 J2.2 K7.4 PS1.7 PS1.8 TP39.P$1 U1.1 U2.2 U5.2 U19.8 U20.5 U20.6
BU-REL-C: D14.C J8.3 K1.2
EFUSE-EN-2: U12.12 U14.10
EFUSE-EN-3: U12.11 U14.11
EFUSE-F-1: B1.P9.23 U11.14
EFUSE-F-2: B1.P8.8 U12.14
EFUSE-F-3: B1.P8.12 U12.13
EFUSE_GAS_ON: B1.P9.27 U11.13
EN-AU: IC3.13 IC3.14 IC3.15 IC3.16 U12.6
EN-BU: IC1.13 IC1.14 IC1.15 IC1.16 U12.5
F-AU: IC3.5 R11.2 U12.4
F-BU: IC1.5 R9.2 U12.3
FAULT-1: R20.2 U11.3 U17.3
GAS-12V-5V: C1.1 CR11.1 TP18.P$1 U2.5 U11.1 U11.7
GAS-12V-GND: C1.2 CR5.2 CR6.2 CR11.2 J4.2 K7.6 R19.1 R20.1 TP21.P$1 U2.4 U11.2 U11.8 U15.2 U17.2
GAS-12V-POS: K2.2 K7.3
GAS-12V-PWR: CR5.1 F4.1 J4.1 U17.1
GAS_ON: R19.2 U11.4 U15.3
GND: B1.P8.1 B1.P8.2 B1.P9.1 B1.P9.2 B1.P9.43 B1.P9.44 B1.P9.45 B1.P9.46 C2.2 C3.2 C6.2 C7.2 C8.2 C9.2 C10.2 CR7.2 CR15.2 D1.A D2.A D3.A D4.A D5.A J2.3 J6.7 J6.8 JP1.2 K1.1 K2.1 K3.1 K4.1 K5.1 K6.3 PS3.4 R1.2 R2.2 R7.2 R10.2 R24.2 R25.2 R31.2 R32.2 R33.2 R43.2 SW1.3 SW1.4 SW2.3 SW2.4 TP24.P$1 U4.6 U4.9 U6.6 U6.9 U7.6 U7.9 U8.4 U9.6 U9.9 U10.8 U11.9 U11.15 U12.9 U12.15 U13.9 U13.15 U14.1 U14.3 U14.8 U16.6 U16.9 U18.3 U18.4 U21.2 U22.7 U23.5 U24.2
GND2 [Power]: D12.2 J5.2 J7.1 TP43.P$1
GND3: C13.2 C14.2 CR10.2 R16.2 TP20.P$1 U3.3 U5.4 U8.5
GND4: C4.2 C5.2 C18.- C19.2 C20.- C21.- C22.2 C23.- CR1.2 CR2.2 CR3.2 CR4.2 CR8.2 CR9.2 CR12.2 CR13.2 CR14.2 D13.2 D14.A IC1.8 IC1.17 IC3.8 IC3.17 J2.1 J3.2 J8.2 K3.3 K4.3 K5.3 K7.5 PS1.4 PS1.5 R46.1 R47.1 TP11.P$1 TP38.P$1 U1.2 U2.1 U5.1 U12.2 U12.8 U13.2 U13.8 U19.4 U20.4 U20.7
INDICATOR1: B1.P8.44 LED5.A
INDICATOR2: B1.P8.42 LED4.A
INDICATOR3: B1.P8.46 LED3.A
INDICATOR4: B1.P8.45 LED2.A
INPUT1: B1.P8.41 R36.1 SW1.1 SW1.2
INPUT2: B1.P8.43 R38.1 SW2.1 SW2.2
MEM-WP: JP1.1 R45.2 U18.7
MOD-RX: B1.P9.26 U8.1
MOD-TX: B1.P9.24 U8.2
N$1: CR6.1 F4.2 K2.3 U15.1
N$2: R2.1 U9.4
N$3: D3.C K3.5 U4.7
N$4: R1.1 U6.4
N$5: TP1.P$1 U4.3
N$6: R28.1 TP8.P$1 U13.4
N$7: CR3.1 R21.1 R26.2
N$8: CR4.1 R22.1 R27.2
N$9: CR2.1 R17.1 R29.2
N$10: R29.1 TP7.P$1 U13.3
N$11: CR1.1 R18.1 R28.2
N$12: R4.2 U9.5
N$13: R6.1 R16.1 TP13.P$1 U8.7
N$14: R14.1 R15.2
N$15: TP4.P$1 U9.3
N$16: R13.1 R37.2 TP14.P$1 U8.6
N$17: J4.4 R6.2 R14.2 U3.2
N$18: R10.1 U16.4
N$19: D1.C K5.5 U7.7
N$20: B1.P9.25
N$21: R12.2 U16.5
N$22: R3.2 U6.5
N$23: B1.P9.3 B1.P9.4
N$24: J3.6 K5.2
N$25: B1.P9.7 B1.P9.8
N$26: J3.5 K4.2
N$27: R26.1 TP9.P$1 U13.5
N$28: J3.4 K3.2
N$29: D5.C K2.5 U16.7
N$30: D2.C K4.5 U6.7
N$31: R7.1 U7.4
N$32: C19.1 IC1.6
N$33: TP3.P$1 U7.3
N$34: TP5.P$1 U16.3
N$35: R27.1 TP10.P$1 U13.6
N$36: D6.A D7.A D8.A K6.1 K7.1 K8.COIL1 TP17.P$1 U$1.-VOUT
N$37: R8.2 U7.5
N$38: J8.4 R17.2
N$39: J8.5 R18.2
N$40: J8.6 R21.2
N$41: J8.7 R22.2
N$42: TP2.P$1 U6.3
N$43: D4.C K1.5 U9.7
N$44: JP2.1 TP16.P$1 U$1.+VOUT
N$45: U14.9
N$47: IC1.7 R46.2
N$48: J4.3 R13.2 R15.1 U3.1
N$49: D6.C D7.C D8.C JP2.2 K6.5 K7.8 K8.COIL2
N$52: LED2.C R24.1
N$53: LED3.C R31.1
N$54: LED4.C R32.1
N$55: LED5.C R33.1
N$56: R25.1 U4.4
N$57: R30.2 U4.5
N$59: R34.2 U23.4
N$60: R35.2 U23.3
N$61: R39.2 U23.2
N$62: R41.2 U23.1
N$63: J6.4 R34.1
N$64: LED1.C R43.1
N$66: J6.3 R35.1
N$67: C22.1 IC3.6
N$68: IC3.7 R47.2
N$69: J6.2 R39.1
N$71: J6.1 R41.1
N$73: F1.1 J7.2 TP42.P$1
PB-48V-GND [Power]: D10.2 J5.4 J18.1 J18.2 J18.3 K8.NO2 PS1.2 PS1.3 PS3.2 TP12.P$1 U19.2 U19.3 U20.2
PB-48V-POS [Power]: D10.1 J5.3 J19.1 J19.2 J19.3 K8.NO1 PS1.1 PS3.1 TP15.P$1 U19.1 U20.3
PB-48V/12V-GND [Power]: D11.2 J20.1 J20.2 J20.3 K7.7 K8.COM2 TP23.P$1 U$1.-VIN
PB-48V/12V-POS [Power]: D11.1 J12.1 J12.2 J12.3 K7.2 K8.COM1 TP22.P$1 U$1.+VIN
PUSH_BUTTON_IN: B1.P8.10 J6.6 R42.1
PWR-AU: C23.+ CR14.1 IC3.1 IC3.4 IC3.9 IC3.12 J3.1
PWR-BU: C20.+ CR9.1 IC1.1 IC1.4 IC1.9 IC1.12 J8.1 K1.3
R1W1: B1.P8.14 B1.P8.15 U13.11
R1W2: B1.P8.16 U13.12
R2W1: B1.P8.18 B1.P8.40 U13.13
R2W2: B1.P8.26 B1.P8.39 U13.14
RELAY1: U14.4 U22.5
RELAY1SU: U9.1 U9.2 U22.10
RELAY2: U14.5 U22.4
RELAY2SU: U4.1 U4.2 U22.11
RELAY3: U14.6 U22.3
RELAY3SU: U6.1 U6.2 U22.12
RELAY4: U14.7 U22.2
RELAY4SU: U7.1 U7.2 U22.13
RELAY5: U14.12 U24.3
RELAY5SU: U16.1 U16.2 U24.4
RESET: R44.2 U14.2
SCL: B1.P9.19 R40.2 U10.4 U14.14 U18.6 U23.6
SDA: B1.P9.20 R5.2 U10.1 U14.15 U18.5 U23.7
VCC: C2.1 C3.1 C6.1 C7.1 C8.1 C9.1 C10.1 CR15.1 J6.5 LED1.A R5.1 R23.2 R36.2 R38.2 R40.1 R42.2 R44.1 R45.1 TP25.P$1 U8.3 U10.2 U10.5 U10.6 U10.7 U11.10 U11.16 U12.10 U12.16 U13.10 U13.16 U14.16 U18.8 U21.3 U22.1 U23.8 U24.1
VCC/2: C4.1 C5.1 CR12.1 R9.1 R11.1 TP6.P$1 U1.3 U12.1 U12.7 U13.1
VSS [Power]: D12.1 F1.2 J5.1